# Altium PCB PCB1.PcbDoc
Units mm, origin at the board's own origin, x right, y up, seen from the top; angles counter-clockwise.
Board outline 36.84 x 36.93 mm, 4 copper layers (Top Layer, Layer 1, Layer 2, Bottom Layer), stack 0.567 mm thick; 24 components, 34 nets, 115 pads, 30 vias.
Unrouted connection lines stored in the file: 6.
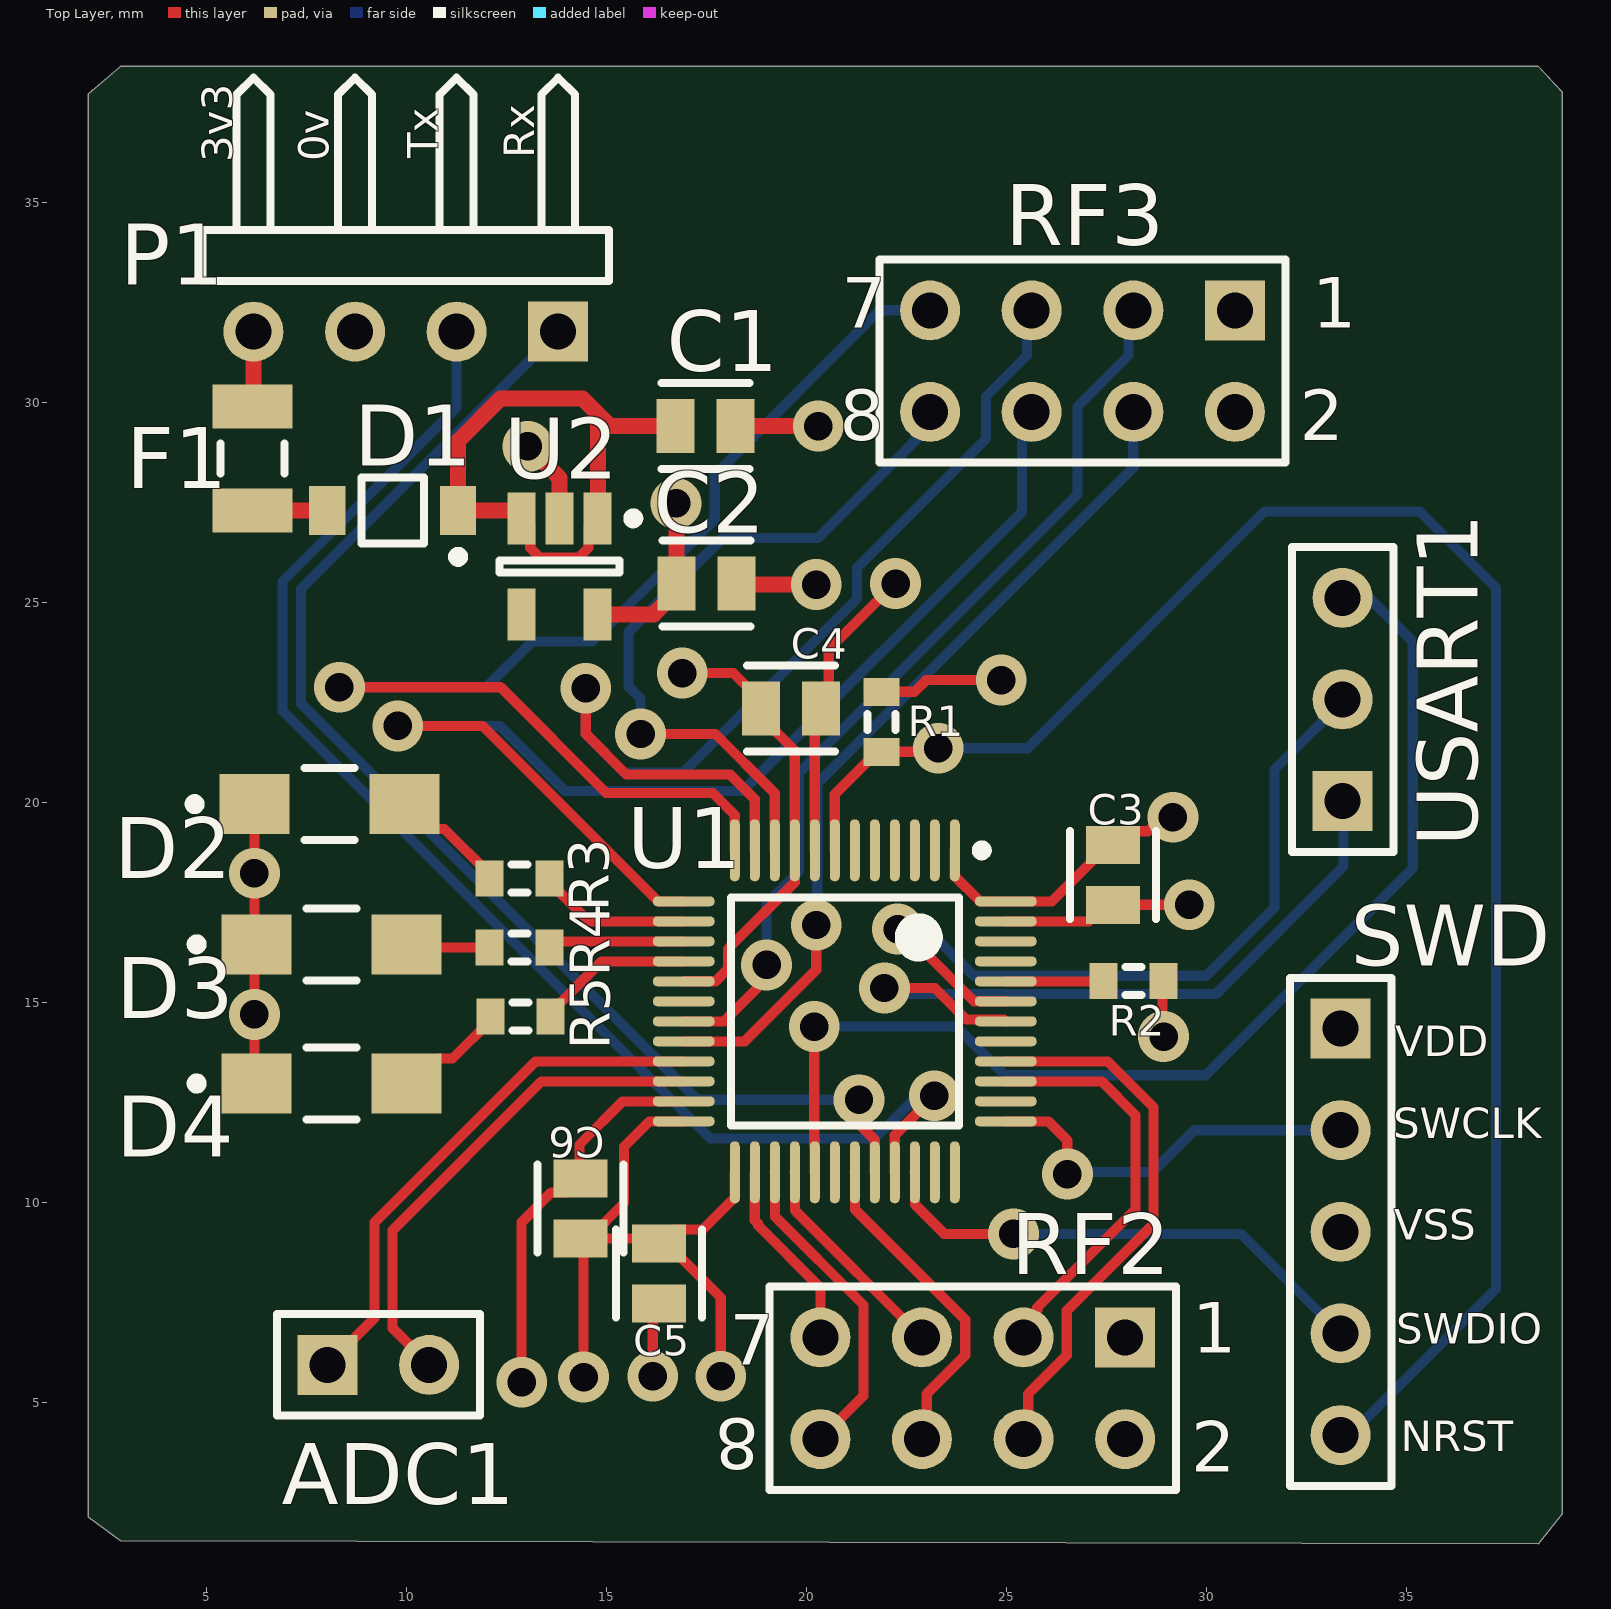
[diagram p0: Top Layer view]
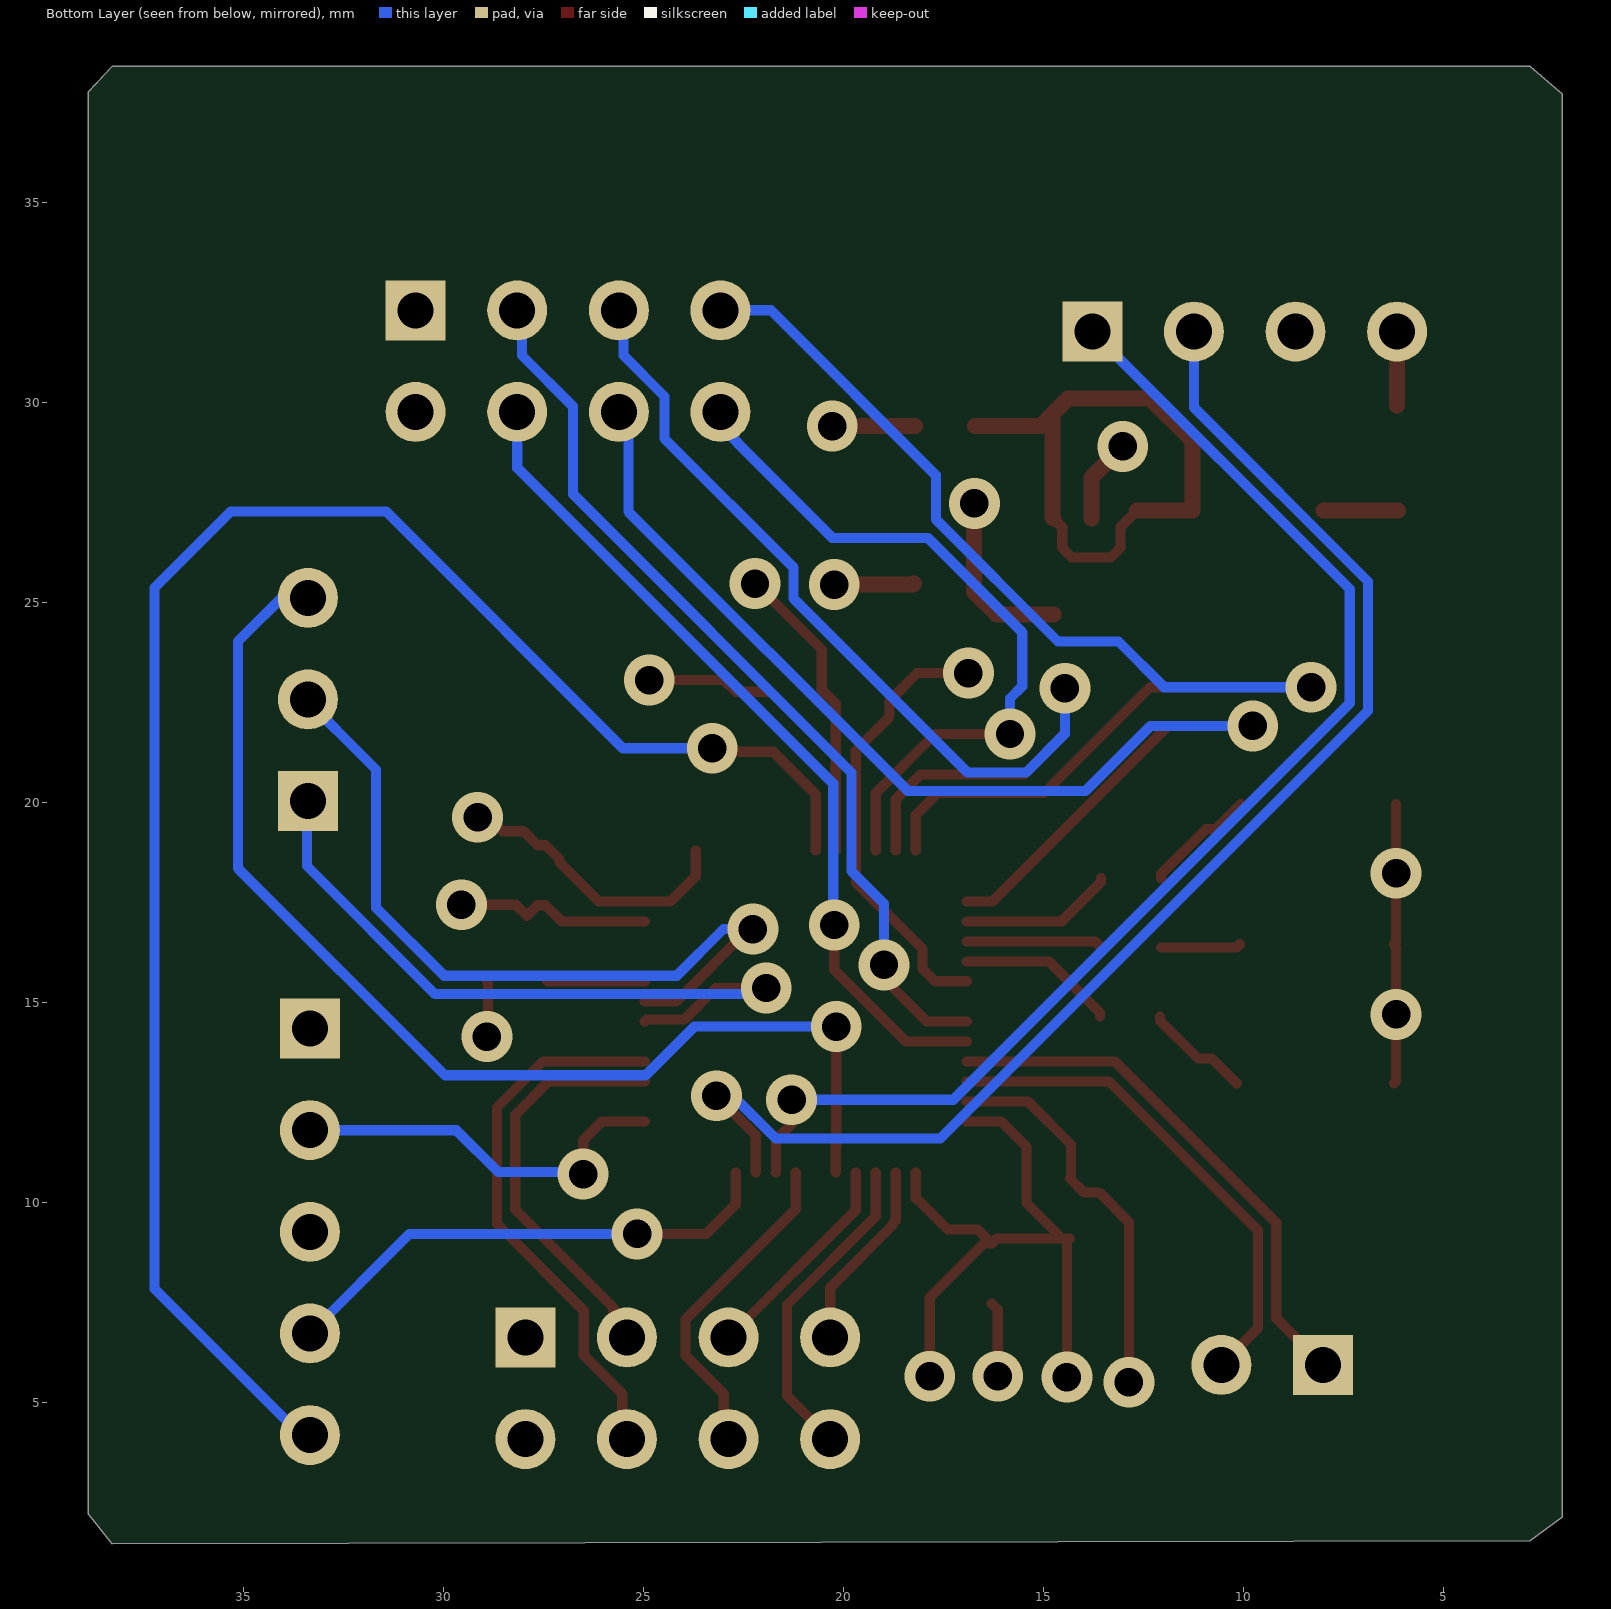
[diagram p1: Bottom Layer view, seen from below]
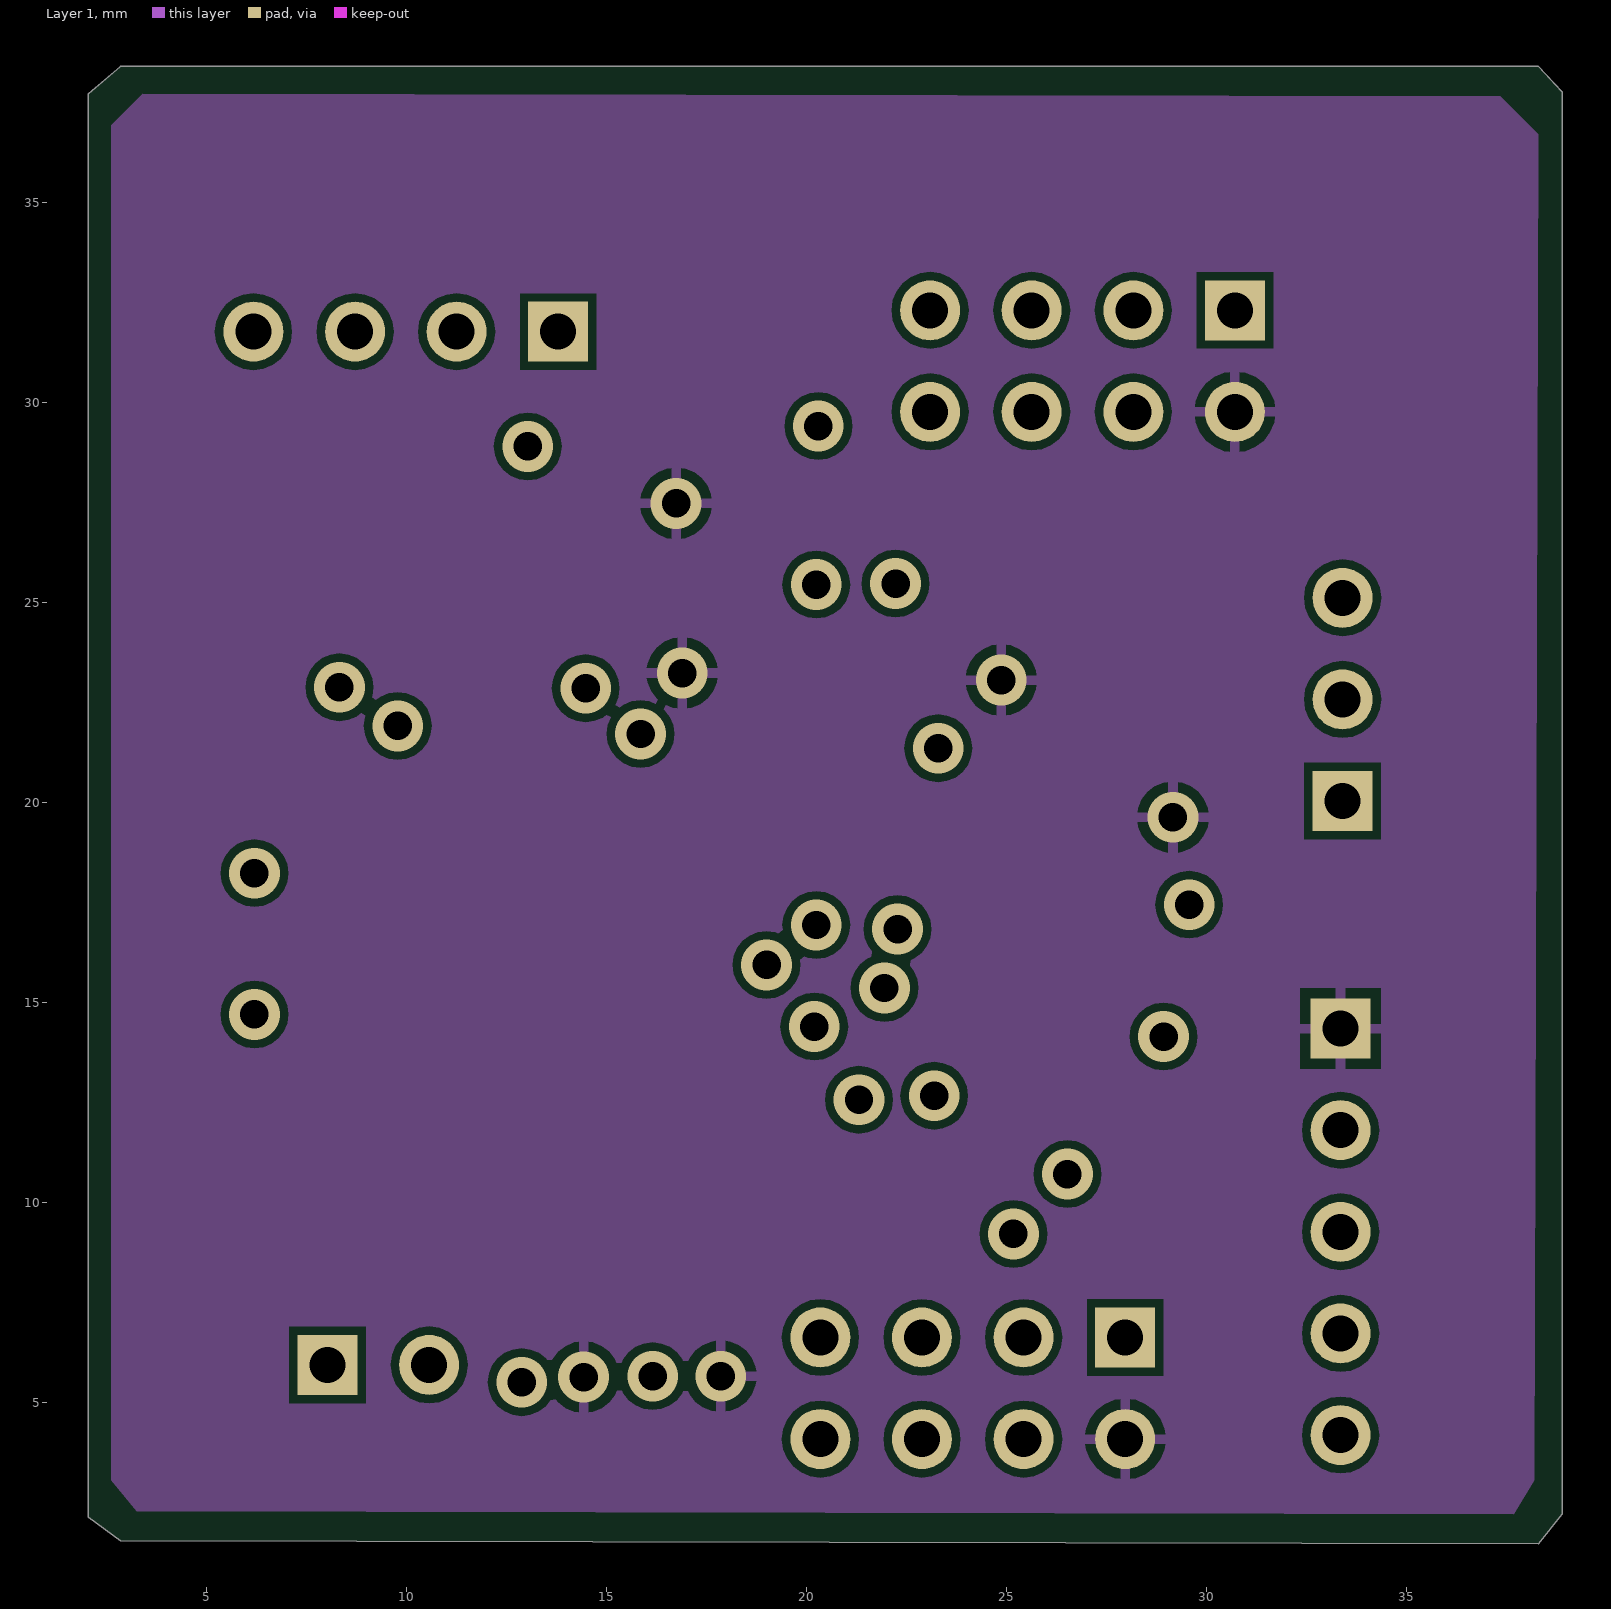
[diagram p2: Layer 1]

## Layer stack, top to bottom
Top Solder: solder mask 0.0102, Solder Resist, Dk 3.5
Top Layer: signal copper 0.035
Dielectric 2: prepreg 0.0711, PP-006, Dk 4.5
Layer 1: signal copper 0.0175
Dielectric 1: prepreg 0.32, FR-4, Dk 4.5
Layer 2: signal copper 0.0175
Dielectric 3: prepreg 0.0711, PP-006, Dk 4.5
Bottom Layer: signal copper 0.035
Bottom Solder: solder mask 0.0102, Solder Resist, Dk 3.5

## Board outline
2.048,37.723 2.845,38.405 38.297,38.405 38.888,37.774 38.888,2.211 38.297,1.474 2.845,1.547 2.048,2.135

## Design rules (kind name [scope] priority, off if disabled: settings)
Clearance [All] p1: gap=0.203 ignorepadtopadclearanceinfootprint=TRUE except(0: Arc-Text Arc-Hole Track-Text Track-Hole SMDPad-Text SMDPad-Hole THPad-Text THPad-Hole Via-Text Via-Hole Fill-Text Fill-Hole Poly-Text Poly-Hole Region-Text Region-Hole Text-Text Text-Hole; 0.178: SMDPad-SMDPad)
MinimumSolderMaskSliver [All] p1: minsoldermaskwidth=0.127
PolygonConnect [All] p1: connectstyle=Relief reliefconductorwidth=0.254 reliefentries=4 polygonreliefangle="90 Angle" airgapwidth=0.254
RoutingVias [All] p1: holewidth=0.711 width=1.27 viastyle="Through Hole" minholewidth=0.711 minwidth=1.27 maxholewidth=0.711 maxwidth=1.27
SilkToSilkClearance [HasFootprint('No Footprint') vs HasFootprint('No Footprint')] p1: silktosilkclearance=0
SilkToSolderMaskClearance [IsPad vs HasFootprint('STM-LQFP48_L')] p1: minsilkscreentomaskgap=0.254 clearancetoexposedcopper=TRUE
SolderMaskExpansion [All] p1: expansion=0.051 istentingtop=FALSE
Width [All] p1: maxlimit=0.508 minlimit=0.254 preferedwidth=0.254 midlayer1_maxwidth=0.254 midlayer2_maxwidth=0.254 bottomlayer_maxwidth=0.254 minimp=50.000000 maximp=50.000000 favimp=50.000000
27 further rules are at their usual default settings.

## Components (designator, comment, footprint, x,y, rotation, side; value= is the part's Value field where it differs from the comment)
ADC1 "Header 2" HDR1X2 8.026,5.944 r0 top (schematic designator P?)
C1 "1uF" FP-C0805C-DN-MFG 17.475,29.413 r0 top value="0.22 μF"
C2 "1uF" FP-C0805C-DN-MFG 17.501,25.476 r0 top value="0.22 μF"
C3 "4.7uF" FP-C0805C-DN-MFG 27.661,18.186 r270 top value="0.22 μF"
C4 "10nF" FP-C0805C-DN-MFG 19.609,22.352 r0 top value="0.22 μF"
C5 "10nF" FP-C0805C-DN-MFG 16.307,8.23 r270 top value="0.22 μF"
C6 "10nF" FP-C0805C-DN-MFG 14.351,9.855 r90 top value="0.22 μF"
D1 "MBR120VLSFT1" ONSC-SOD-123FL-2-498-01_V 9.652,27.305 r180 top
D2 "APTD3216CGCK" FP-APTD3216CGCK-MFG 8.077,19.964 r0 top
D3 "APTD3216CGCK" FP-APTD3216CGCK-MFG 8.128,16.459 r0 top
D4 "APTD3216CGCK" FP-APTD3216CGCK-MFG 8.128,12.979 r0 top
F1 "3413.0330.22" FP-3413_0330_22-MFG 6.147,28.6 r270 top value=3.5mΩ
P1 "Ext-Con" HDR1X4H 13.792,31.775 r180 top
R1 "Res3" J1-0603 21.869,22.022 r270 top value=10k
R2 "Res3" J1-0603 28.169,15.545 r0 top value=10k
R3 "Res3" J1-0603 12.827,18.11 r180 top value=1K
R4 "Res3" J1-0603 12.827,16.383 r180 top value=1K
R5 "Res3" J1-0603 12.852,14.656 r0 top value=1K
RF2 "nRF24-Con" HDR2X4 27.965,6.629 r180 top
RF3 "nR24-Con" HDR2X4 30.709,32.309 r180 top
SWD "Header 5" HDR1X5 33.35,14.351 r270 top (schematic designator P2)
U1 "STM32F373CCT6" STM-LQFP48_L 20.955,14.783 r270 top
U2 "LD39015M33R" SOT23-5L_M 13.818,25.908 r270 top
USART1 "Header 3" HDR1X3 33.401,20.041 r90 top

## Footprints (in the part's own frame and the unit in brackets; to place one, negate y for a bottom-side part, rotate by r counter-clockwise, add the part's x,y. Pads: shape width x height; smd on the part's side, far side on the other; paste and mask are expansions set on the pad)
FP-3413_0330_22-MFG [mm]
  rect 1.1x2 smd paste+0 mask+0: 1(-1.3,0) 2(1.3,0)
  silkscreen extent -0.38,-0.8 0.38,0.8, body extent -1.95,-1.1 1.95,1.1, height 0.25
FP-APTD3216CGCK-MFG [mm]
  rect 1.75x1.5 smd paste+0 mask+0: 1(-1.875,0) 2(1.875,0)
  silkscreen extent -3.5,-0.9 0.63,0.9, body extent -2.85,-1 2.85,1, height 0.25
FP-C0805C-DN-MFG [mm]
  rect 0.95x1.35 smd paste+0 mask+0: 1(-0.75,0) 2(0.75,0)
  silkscreen extent -1.1,-1.07 1.1,1.07, body extent -1.4,-0.85 1.4,0.85, height 0.25
HDR1X2 [mm] "Connector; Header; 2 Position"
  rect 1.5x1.5 hole 0.9: 1(0,0)
  round 1.5 hole 0.9: 2(2.54,0)
  silkscreen extent -1.27,-1.27 3.81,1.27
HDR1X3 [mm] "Connector; Header; 3 Position"
  rect 1.5x1.5 hole 0.9: 1(0,0)
  round 1.5 hole 0.9: 2(2.54,0) 3(5.08,0)
  silkscreen extent -1.27,-1.27 6.35,1.27
HDR1X4H [mm] "Connector; Header; 4 Position; Right Angle"
  rect 1.5x1.5 hole 0.9: 1(0,0)
  round 1.5 hole 0.9: 2(2.54,0) 3(5.08,0) 4(7.62,0)
  silkscreen extent -1.27,-6.35 8.89,-1.27
HDR1X5 [mm] "Connector; Header; 5 Position"
  rect 1.5x1.5 hole 0.9: 1(0,0)
  round 1.5 hole 0.9: 2(2.54,0) 3(5.08,0) 4(7.62,0) 5(10.16,0)
  silkscreen extent -1.27,-1.27 11.43,1.27
HDR2X4 [mm] "Connector; Header; 4x2 Position"
  rect 1.5x1.5 hole 0.9: 1(0,0)
  round 1.5 hole 0.9: 2(0,2.54) 3(2.54,0) 4(2.54,2.54) 5(5.08,0) 6(5.08,2.54) 7(7.62,0) 8(7.62,2.54)
  silkscreen extent -1.27,-1.27 8.89,3.81
J1-0603 [mm] "Chip Resistor, Body 1.6x0.8mm, IPC High Density"
  rect 0.7x0.9 smd: 1(-0.75,0) 2(0.75,0)
  silkscreen extent -0.2,-0.35 0.2,0.35, body extent -0.85,-0.48 0.85,0.48, height 0.9
ONSC-SOD-123FL-2-498-01_V [mm] "SOD, 2-Leads, Body 2.7x1.65mm"
  rect 0.91x1.22 smd: 1(-1.635,0) 2(1.635,0)
  silkscreen extent -1.76,-0.82 0.78,1.28, body extent -1.35,-0.82 1.35,0.82, height 1
SOT23-5L_M [mm] "SOT23, 5-Leads, Body 2.9x1.6mm, Pitch 0.95mm, Lead Span 2.8mm, IPC Low Density"
  rect 1.3x0.7 smd: 1(-1.2,0.95) 2(-1.2,0) 3(-1.2,-0.95) 4(1.2,-0.95) 5(1.2,0.95)
  silkscreen extent -1.32,-1.5 0.15,1.98, body extent -0.87,-1.5 0.87,1.5, height 1.45
STM-LQFP48_L [mm] "QFP, 48-Leads, Body 7x7mm, Pitch 0.5mm, IPC High Density"
  oval 1.55x0.25 smd: 1(-4.025,2.75) 2(-4.025,2.25) 3(-4.025,1.75) 4(-4.025,1.25) 5(-4.025,0.75) 6(-4.025,0.25) 7(-4.025,-0.25) 8(-4.025,-0.75) 9(-4.025,-1.25) 10(-4.025,-1.75) 11(-4.025,-2.25) 12(-4.025,-2.75) 25(4.025,-2.75) 26(4.025,-2.25) 27(4.025,-1.75) 28(4.025,-1.25) 29(4.025,-0.75) 30(4.025,-0.25) 31(4.025,0.25) 32(4.025,0.75) 33(4.025,1.25) 34(4.025,1.75) 35(4.025,2.25) 36(4.025,2.75)
  oval 0.25x1.55 smd: 13(-2.75,-4.025) 14(-2.25,-4.025) 15(-1.75,-4.025) 16(-1.25,-4.025) 17(-0.75,-4.025) 18(-0.25,-4.025) 19(0.25,-4.025) 20(0.75,-4.025) 21(1.25,-4.025) 22(1.75,-4.025) 23(2.25,-4.025) 24(2.75,-4.025) 37(2.75,4.025) 38(2.25,4.025) 39(1.75,4.025) 40(1.25,4.025) 41(0.75,4.025) 42(0.25,4.025) 43(-0.25,4.025) 44(-0.75,4.025) 45(-1.25,4.025) 46(-1.75,4.025) 47(-2.25,4.025) 48(-2.75,4.025)
  silkscreen extent -4.15,-2.85 2.85,3.55, body extent -3.5,-3.5 3.5,3.5, height 1.6

## Part data
ADC1: "Header, 2-Pin", LatestRevisionDate=17-Jul-2002, LatestRevisionNote="Re-released for DXP Platform.", Publisher="Altium Limited"
C1 C2 C3 C4 C5 C6: library part CMP-1036-04552-2, "CAP CER 0.22UF 50V X7R 0805", Capacitance="0.22 μF", Manufacturer=KEMET, Manufacturer Part Number=C0805C224K5RACTU, Package=C0805C-DN, Temperature="-55°C to +125°C", Temperature Characteristic=X7R, Temperature Coefficient=30ppm/°C, Temperature Range High=+125°C, Temperature Range Low=-55°C, Tolerance=0.1, Voltage Rating="50 V", Automotive=No, Category=Cap, ComponentLink2Description=Datasheet, ComponentLink2URL=https://content.kemet.com/datasheets/KEM_C1003_C0G_SMD.pdf, Device Class L1="Passive Components", Device Class L2=Capacitors, Device Class L3="Ceramic Capacitors", Digikey Description="CAP CER 0.22UF 50V X7R 0805", Height=0.88mm, Ipc Land Pattern Name=CAPC200125X78, Lead Free=Yes, Material=Ceramic, Mouser Description="CAP CER 0.22UF 50V X7R 0805", Octopart=https://octopart.com/c0805c224k5ractu-kemet-144670, RoHS=TRUE
D1: library part CMP-1055-00448-1, "Schottky Power Rectifier, 2-Pin SOD-123, Tape and Reel", Manufacturer="On Semiconductor", ComponentLink1Description="Manufacturer URL", ComponentLink1URL=http://www.onsemi.com/, ComponentLink2Description=Datasheet, ComponentLink2URL=http://www.onsemi.cn/pub_link/Collateral/MBR120VLSFT1-D.PDF, ComponentLink3Description="Package Specification", ComponentLink3URL=http://www.onsemi.cn/pub_link/Collateral/MBR120VLSFT1-D.PDF, Configuration=Single, DatasheetVersion="Rev. 2", IFSM Max (A)=45, Mounting Technology="Surface Mount", PackageDescription="2-Pin SOD, Body 1.65 x 2.7 mm", PackageReference=SOD-123FL-2-498-01, PackageVersion="Rev. A", Packing="Tape and Reel", PartNumber=MBR120VLSFT1, RoHS=FALSE
D2 D3 D4: library part CMP-2000-05792-2, "LED GREEN CLEAR 2SMD", Case Code (Imperial)=1206, Case Code (Metric)=3216, Color=Green, Forward Current=20mA, Forward Voltage=2.1V, Lens Color=Clear, Max Operating Temperature=85°C, Min Operating Temperature=-40°C, Package Quantity=2000, Case/Package=1206, Dominant Wavelength=570nm, Height=1.8mm, Illumination Color=Green, Lead Free="Lead Free", Length=3.2mm, Lens Style=Clear, Luminous Intensity=300mcd, Mount="Surface Mount", Number of LEDs=1, Number of Pins=2, Packaging="Tape and Reel", Test Current=20mA, Viewing Angle=50°, Width=1.6mm
F1: library part CMP-26293-000001-1, "FUSE BOARD MNT 15A 32VAC 63VDC", Ambient Temperature Range High=+90°C, Ambient Temperature Range Low=-55°C, Fuse Current=15A, Fuse Interrupt Dc Current=100A, Fuse Voltage Drop=57mV, Manufacturer="Schurter Inc", Max Fuse Ac Voltage=32V, Max Fuse Dc Voltage=63V, Package=0, Resistance=3.5mΩ, Automotive=No, Category=Fuse, ComponentLink2Description=Datasheet, ComponentLink2URL=https://us.schurter.com/en/datasheet/typ_UST_1206.pdf, Device Class L1="Circuit Protection", Device Class L2=Fuses, Device Class L3=unset, Digikey Description="FUSE BOARD MNT 15A 32VAC 63VDC", Fuse Blow Speed=Slow, Fuse I2T=65A2Sec, Height=0.6mm, Ipc Land Pattern Name=CAPC320160X60, Lead Free=Yes, Manufacturer Part Number=3413.0330.22, Mouser Description="Surface Mount Fuses UST 1206 FUSE 15A F", Octopart=https://octopart.com/3413.0330.22-schurter-8400836, RoHS=TRUE, Voltage Rating=63V
P1: library part "Header 4H", "Header, 4-Pin, Right Angle", LatestRevisionDate=17-Jul-2002, LatestRevisionNote="Re-released for DXP Platform.", Publisher="Altium Limited"
R1 R2 R3 R4 R5: "Resistor", LatestRevisionDate=29-May-2009, LatestRevisionNote="IPC-7351 Footprint Added.", PackageDescription="Chip Resistor", PackageReference=J1-0603, Published=8-Jun-2000, Publisher="Altium Limited"
RF2 RF3: library part "Header 4X2", "Header, 4-Pin, Dual row", LatestRevisionDate=17-Jul-2002, LatestRevisionNote="Re-released for DXP Platform.", Publisher="Altium Limited"
SWD: "Header, 5-Pin", LatestRevisionDate=17-Jul-2002, LatestRevisionNote="Re-released for DXP Platform.", Publisher="Altium Limited"
U1: library part CMP-0572-00021-2, "ARM Cortex-M4 32-bit MCU, 256 KB Flash, 32 KB Internal RAM, 36 I/Os, 48-pin LQFP, -40 to 85 degC, Tray", I/Os (High Current)=36, Operating Frequency(F) (Processor speed) (MHz)=72, Supply Voltage(Vcc) min (V)=2, ComponentLink1Description="Manufacturer URL", ComponentLink1URL=http://www.st.com/web/en/home.html, ComponentLink2Description=Datasheet, ComponentLink2URL=http://www.st.com/st-web-ui/static/active/en/resource/technical/document/datasheet/DM00046749.pdf, ComponentLink3Description="Package Specification", ComponentLink3URL=http://www.st.com/st-web-ui/static/active/en/resource/technical/document/datasheet/DM00058181.pdf, Core="ARM Cortex-M4", DatasheetVersion="Rev. 3", FLASH Size (Prog) (kB)=256, Internal RAM Size (kB)=32, Mounting Technology="Surface Mount", PackageDescription="48-Pin Low Profile Quad Flat Package, 7 x 7 mm Body, 0.5 mm Pitch", PackageReference=LQFP48, PackageVersion="Rev. 6, 06/2013", Packing=Tray, PartNumber=STM32F373CCT6
U2: library part CMP-0244-00351-1, "150 mA Low Quiescent Current Low Noise Voltage Regulator, 3.3V, 5-Pin SOT-23, Tape and Reel", ComponentLink1Description="Manufacturer URL", ComponentLink1URL=http://www.st.com, ComponentLink2Description=Datasheet, ComponentLink2URL=http://www.st.com/internet/com/TECHNICAL_RESOURCES/TECHNICAL_LITERATURE/DATASHEET/CD00173477.pdf, DatasheetVersion=1/02/2009, PackageDescription="5-Pin SOT-23 Package, 2.9 x 1.6 mm Body, 0.95 mm Pitch, 2.8 mm Lead Span", PackageReference=SOT23-5L, PackageVersion=1/01/2008
USART1: "Header, 3-Pin", LatestRevisionDate=17-Jul-2002, LatestRevisionNote="Re-released for DXP Platform.", Publisher="Altium Limited"

## Via types
v1: diameter 1.27, hole 0.711, Top Layer to Bottom Layer, 30 vias

## Nets (pads, with @x,y where several pads share a name; then routed paths per layer and width w, separated by ;. In a path a pad name is that pad's centre, name@x,y a point inside that pad or via, vN(x,y) a via of type N, cw(c..) or ccw(c..) an arc to the next point about the centre after c; other vN are vias at no path point)
GND: C1.2 C2.2 C3.2 C4.2 C5.2 C6.2 D2.1 D3.1 D4.1 P1.3 R2.2 RF2.1 RF3.1 SWD.3 U1.8 U1.23 U1.47 U2.2 | length 38.9
  Top Layer w0.254: D2.1 6.198,19.96 v1(6.198,18.237) 6.198,16.515 D3.1 6.198,16.404 v1(6.198,14.707) 6.198,13.035 D4.1 ; v1(12.878,5.512) 12.878,9.514 13.621,10.257 14.003,10.257 C6.2 14.326,10.631 14.326,11.455 15.403,12.533 U1.23 ; v1(16.154,5.662) 16.154,7.327 C5.2 ; U1.8 C4.2@20.205,22.479 ; C4.2@20.206,22.479 20.554,22.827 20.554,23.831 22.2,25.476 v1@22.25,25.476 ; U1.47 27.057,17.033 27.461,17.436 C3.2 27.927,17.17 28.206,17.45 v1(29.566,17.45) ; R2.2 28.899,15.525 28.899,14.179 v1(28.927,14.151)
  Top Layer w0.4: v1(13.03,28.905) 13.818,28.118 U2.2 ; C1.2 v1(20.295,29.413) ; C2.2 18.276,25.451 v1(20.244,25.451)
  other v1: 22.225,25.476
NetADC1_1: ADC1.1 U1.21 | length 13.4
  Top Layer w0.254: ADC1.1 9.195,7.112 9.195,9.5 13.228,13.533 U1.21
NetADC1_2: ADC1.2 U1.22 | length 12.6
  Top Layer w0.254: ADC1.2 9.652,6.858 9.652,9.31 13.375,13.033 U1.22
NetC1_1: C1.1 D1.1 U2.1 U2.3 | length 15.5
  Top Layer w0.254: U2.3@12.671,27.305 U2.3 13.091,26.885 13.091,26.368 13.331,26.128 14.304,26.128 14.545,26.368 14.545,26.885 U2.1
  Top Layer w0.4: U2.3@12.671,27.305 D1.1 11.287,29.042 12.344,30.099 14.402,30.099 14.783,29.718 ; U2.1 14.783,27.123 14.783,29.718 ; C1.1 15.088,29.413 14.783,29.718
NetD1_2: D1.2 F1.2 | length 1.9
  Top Layer w0.254: D1.2@8.012,27.3 D1.2
  Top Layer w0.4: F1.2 D1.2@8.012,27.3
NetD2_2: D2.2 R3.2 | length 2.8
  Top Layer w0.254: D2.2@10.079,19.964 10.702,19.341 10.946,19.341 12.077,18.21 R3.2
NetD3_2: D3.2 R4.2 | length 2
  Top Layer w0.254: D3.2@10.105,16.459 10.181,16.383 R4.2
NetD4_2: D4.2 R5.1 | length 2.7
  Top Layer w0.254: D4.2@10.181,12.979 10.804,13.602 11.149,13.602 12.102,14.556 R5.1
NetF1_1: F1.1 P1.4 | length 1.9
  Top Layer w0.254: F1.1 F1.1@6.172,29.926
  Top Layer w0.4: F1.1@6.172,29.926 P1.4
NetP1_1: P1.1 U1.32 | length 32
  Top Layer w0.254: v1(21.311,12.573) 21.311,11.963 21.703,11.571 21.703,10.76 U1.32
  Bottom Layer w0.254: P1.1 7.357,25.34 7.357,22.486 17.269,12.573 v1(21.311,12.573)
NetP1_2: P1.2 U1.33 | length 34.8
  Top Layer w0.254: U1.33 22.205,11.689 v1(23.19,12.675)
  Bottom Layer w0.254: P1.2 11.252,29.882 6.9,25.529 6.9,22.296 17.588,11.608 21.71,11.608 22.777,12.675 v1(23.19,12.675)
NetR1_2: R1.2 SWD.5 U1.7 | length 44.3
  Top Layer w0.254: U1.7 20.705,20.207 21.769,21.272 R1.2 23.026,21.272 v1@23.038,21.26
  Bottom Layer w0.254: v1(23.292,21.361) 25.527,21.361 31.445,27.28 35.331,27.28 37.236,25.375 37.236,7.849 33.579,4.191 SWD.5
NetR2_1: R2.1 U1.44 | length 2.4
  Top Layer w0.254: U1.44 27.407,15.533 R2.1
NetR3_1: R3.1 U1.14 | length 3.9
  Top Layer w0.254: R3.1 13.577,18.01 14.554,17.033 U1.14
NetR4_1: R4.1 U1.15 | length 3.4
  Top Layer w0.254: R4.1 13.727,16.533 U1.15
NetR5_2: R5.2 U1.16 | length 4
  Top Layer w0.254: R5.2 13.602,14.756 14.879,16.033 U1.16
NetRF2_3: RF2.3 U1.39 | length 10.3
  Top Layer w0.254: U1.39 27.379,13.033 28.219,12.192 28.219,9.83 25.768,7.378 25.768,7.309 25.425,6.967 RF2.3
NetRF2_4: RF2.4 U1.40 | length 13.8
  Top Layer w0.254: U1.40 27.525,13.533 28.677,12.381 28.677,9.472 26.506,7.301 26.506,6.182 25.544,5.22 25.544,4.208 RF2.4
NetRF2_5: RF2.5 U1.28 | length 5.4
  Top Layer w0.254: U1.28 19.707,10.756 19.707,9.808 RF2.5
NetRF2_6: RF2.6 U1.31 | length 8.3
  Top Layer w0.254: U1.31 21.207,10.756 21.207,9.835 23.966,7.077 23.966,6.182 23.004,5.22 23.004,4.208 RF2.6
NetRF2_7: RF2.7 U1.26 | length 4.8
  Top Layer w0.254: U1.26 18.705,9.555 18.791,9.47 18.791,9.431 20.345,7.876 RF2.7
NetRF2_8: RF2.8 U1.27 | length 8
  Top Layer w0.254: U1.27 19.207,10.756 19.207,9.661 21.426,7.443 21.426,5.17 RF2.8
NetRF3_3: RF3.3 U1.19 | length 23
  Top Layer w0.254: U1.19 17.936,14.533 19,15.597 v1(19,15.944)
  Bottom Layer w0.254: v1(19,15.944) 19,17.476 19.812,18.288 19.812,20.752 26.772,27.711 26.772,29.899 28.05,31.178 28.05,32.19 RF3.3
NetRF3_4: RF3.4 U1.20 | length 21.3
  Top Layer w0.254: U1.20 18.454,14.033 20.244,15.823 v1(20.244,16.942)
  Bottom Layer w0.254: v1(20.244,16.942) 20.269,16.968 20.269,20.472 28.169,28.372 RF3.4
NetRF3_5: RF3.5 U1.11 | length 26.5
  Top Layer w0.254: v1(14.478,22.86) 14.478,21.724 15.501,20.701 18.093,20.701 18.705,20.089 U1.11
  Bottom Layer w0.254: v1(14.478,22.86) 14.478,21.724 15.45,20.752 16.91,20.752 21.26,25.102 21.26,25.876 24.486,29.102 24.486,30.153 25.51,31.178 25.51,32.19 RF3.5
NetRF3_6: RF3.6 U1.13 | length 30.7
  Top Layer w0.254: v1(9.779,21.92) 11.897,21.92 16.284,17.533 U1.13
  Bottom Layer w0.254: v1(9.779,21.92) 12.333,21.92 13.959,20.295 18.408,20.295 25.39,27.276 25.39,29.53 RF3.6
NetRF3_7: RF3.7 U1.12 | length 31.4
  Top Layer w0.254: v1(8.322,22.885) 12.351,22.885 14.993,20.244 17.653,20.244 18.205,19.692 U1.12
  Bottom Layer w0.254: v1(8.322,22.885) 11.995,22.885 13.138,24.028 14.649,24.028 17.704,27.083 17.704,28.187 21.825,32.309 RF3.7
NetRF3_8: RF3.8 U1.10 | length 18.1
  Top Layer w0.254: v1(15.85,21.717) 17.724,21.717 19.205,20.236 U1.10
  Bottom Layer w0.254: v1(15.85,21.717) 15.85,22.606 15.545,22.911 15.545,24.257 17.907,26.619 20.295,26.619 22.657,28.981 22.657,29 23.089,29.432 RF3.8
NetSWD_2: SWD.2 U1.37 | length 9.9
  Top Layer w0.254: U1.37 26.042,12.033 26.518,11.557 26.518,10.719 v1(26.522,10.714)
  Bottom Layer w0.254: v1(26.522,10.714) 26.578,10.77 28.651,10.77 29.693,11.811 SWD.2
NetSWD_4: SWD.4 U1.34 | length 12.8
  Top Layer w0.254: U1.34 22.707,10.756 22.707,9.957 23.444,9.22 v1(25.171,9.22)
  Bottom Layer w0.254: v1(25.171,9.22) 30.861,9.22 SWD.4
NetU1_29: U1.29 USART1.3 | length 29.1
  Top Layer w0.254: v1(20.193,14.402) 20.193,11.416 U1.29@20.203,11.406 ; U1.29 20.205,11.552
  Bottom Layer w0.254: v1(20.193,14.402) 23.743,14.402 24.959,13.186 29.975,13.186 35.154,18.364 35.154,24.028 33.884,25.298 USART1.3@33.63,25.298
NetU1_42: U1.42 USART1.1 | length 17.9
  Top Layer w0.254: v1(21.946,15.367) 23.205,15.367 23.997,14.576 24.937,14.576 U1.42
  Bottom Layer w0.254: v1(21.946,15.367) 22.098,15.215 30.226,15.215 33.426,18.415 33.426,20.015 USART1.1
NetU1_43: U1.43 USART1.2 | length 20.2
  Top Layer w0.254: v1(22.276,16.84) 22.379,16.84 24.184,15.035 24.978,15.035 U1.43
  Bottom Layer w0.254: v1(22.276,16.84) 23.012,16.84 24.181,15.672 29.997,15.672 31.699,17.374 31.699,20.828 USART1.2@33.63,22.758
VCC: C2.1 C3.1 C4.1 C5.1 C6.1 R1.1 RF2.2 RF3.2 SWD.1 U1.1 U1.9 U1.17 U1.24 U1.25 U1.48 U2.5 | length 42.4
  Top Layer w0.254: C6.1 C6.1@14.427,9.105 ; v1(14.427,5.639) C6.1@14.427,9.105 ; v1@16.739,26.873 v1@16.751,26.861 ; C2.1@16.751,25.276 C2.1 ; v1(16.891,23.241) 18.17,23.241 18.859,22.552 C4.1 18.859,22.152 19.705,21.306 U1.9 19.703,18.806 19.703,18.012 18.035,16.344 18.035,15.844 17.726,15.535 16.932,15.535 U1.17 ; U1.24 16.928,12.031 16.069,12.031 15.438,11.399 15.438,9.992 C6.1@14.551,9.105 ; v1(17.856,5.662) 17.856,7.63 16.507,8.98 C5.1 ; U1.25 18.205,10.112 18.203,10.11 18.187,10.11 17.405,9.328 16.655,9.328 C5.1 ; R1.1 22.7,22.772 22.992,23.063 v1(24.867,23.063) ; U1.1 23.705,18.162 24.334,17.533 U1.48 26.136,17.533 27.113,18.509 27.113,18.588 27.461,18.936 C3.1 28.009,19.284 28.534,19.284 28.884,19.634 v1(29.159,19.634) ; C6.1@14.427,9.105 C6.1@14.551,9.105 ; C6.1@14.551,9.105 16.181,9.105 C5.1
  Top Layer w0.4: U2.5 16.182,24.708 C2.1@16.751,25.276 ; C2.1 v1@16.751,26.861
  other v1: 16.739,27.483
pads on no net: U1.2 U1.3 U1.4 U1.5 U1.6 U1.18 U1.30 U1.35 U1.36 U1.38 U1.41 U1.45 U1.46 U2.4

## Polygon pours and split planes (outlines as drawn)
VCC on Layer 1 "VCC_L02_P000" (solid, pour order 0): 2.616,36.932 3.405,37.721 37.345,37.661 38.297,36.709 38.189,3.061 37.683,2.214 3.259,2.29 2.616,3.061
GND on Layer 2 "GND_L03_P003" (solid, pour order 3): 2.53,36.808 3.319,37.598 37.259,37.538 38.211,36.586 38.103,2.938 37.597,2.091 3.173,2.167 2.53,2.938

## Silkscreen, mask and mechanical layers (free items; w line width, h text height)
Top Overlay:
  text "Tx" at 10.778,36.111 h0.76 r90
  text "Rx" at 13.191,36.111 h0.76 r90
  text "0v" at 8.06,36.035 h0.76 r90
  text "3v3" at 5.647,36.01 h0.76 r90
  text "VDD" at 34.722,13.665 h0.76
  text "SWCLK" at 34.671,11.608 h0.76
  text "VSS" at 34.696,9.068 h0.76
  text "SWDIO" at 34.747,6.477 h0.76
  text "NRST" at 34.849,3.785 h0.76

## Text inside footprints (layer, text, board x,y; h text height)
RF2: Top Overlay "8" at 18.821,4.597 h1.27 r180; Top Overlay "7" at 18.085,5.944 h1.27; Top Overlay "1" at 29.642,6.248 h1.27; Top Overlay "2" at 29.616,3.277 h1.27
RF3: Top Overlay "8" at 20.828,29.058 h1.27; Top Overlay "7" at 20.879,31.877 h1.27; Top Overlay "1" at 32.639,31.877 h1.27; Top Overlay "2" at 32.334,29.058 h1.27